# Altium PCB led_board.PcbDoc
Units mil, origin at the board's own origin, x right, y up, seen from the top; angles counter-clockwise.
Board outline 394 x 394 mil, 2 copper layers (Top Layer, Bottom Layer); 4 components, 4 nets, 12 pads, 4 vias.
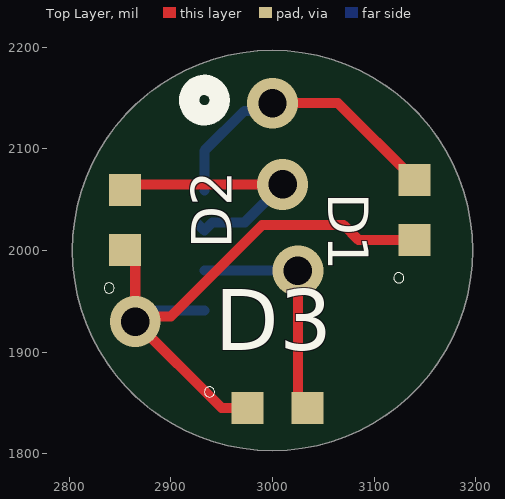
[diagram p0: Top Layer view]
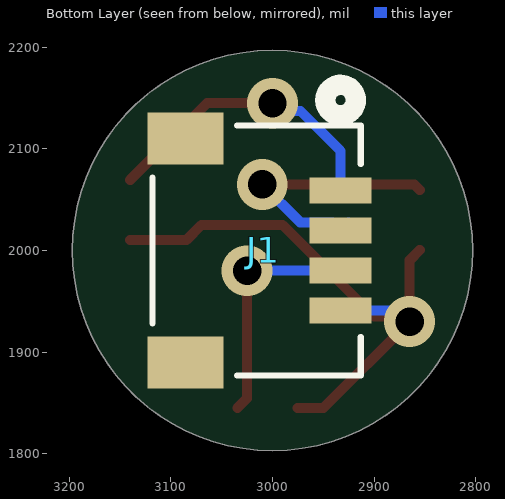
[diagram p1: Bottom Layer view, seen from below]
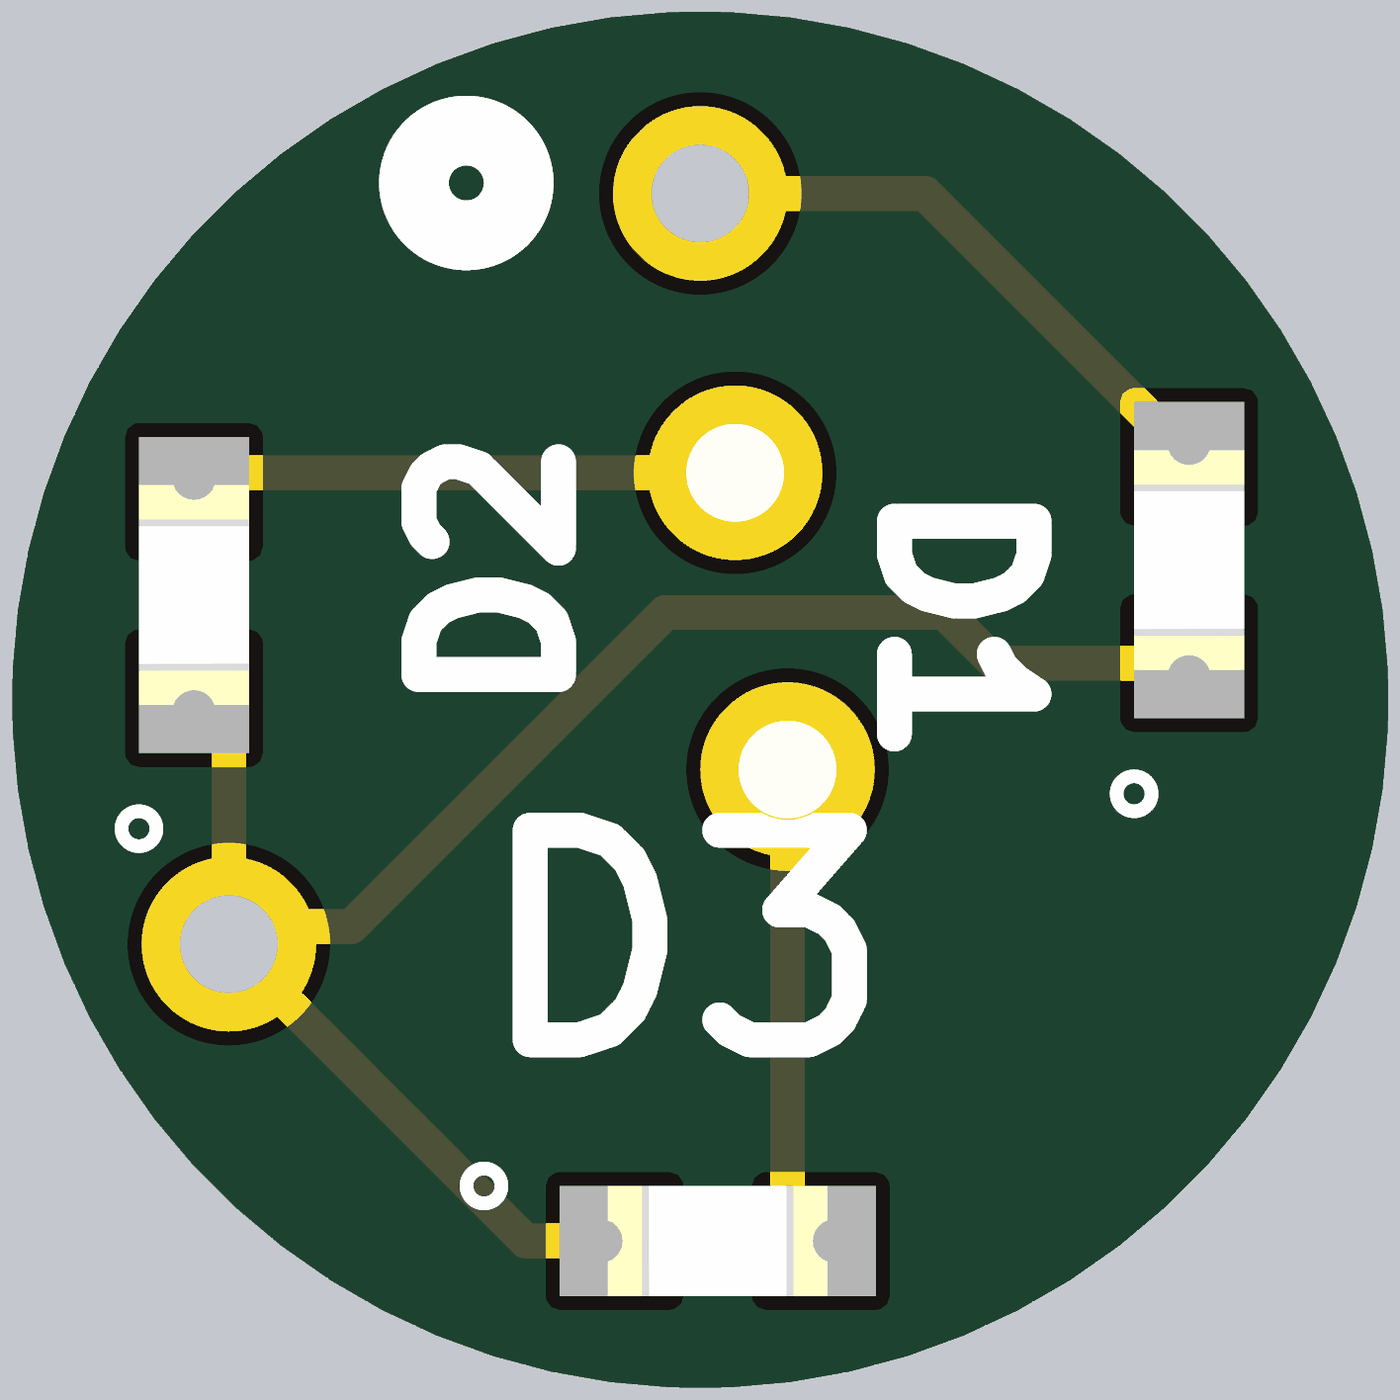
[diagram p2: 3D render of the assembled board from above, using the file's embedded part models]

## Layer stack, top to bottom
Top Solder: solder mask 0.4, Solder Resist, Dk 3.5
Top Layer: signal copper 1.4
Dielectric 1: dielectric 12.6, FR-4, Dk 4.8
Bottom Layer: signal copper 1.4
Bottom Solder: solder mask 0.4, Solder Resist, Dk 3.5

## Board outline
2803,2000 ccw(c3000,2000) 3000,1803 ccw(c3000,2000) 3197,2000 ccw(c3000,2000) 3000,2197 ccw(c3000,2000)

## Design rules (kind name [scope] priority, off if disabled: settings)
Clearance [All] p1: gap=10 ignorepadtopadclearanceinfootprint=FALSE except(0: Arc-Hole Track-Hole SMDPad-Hole THPad-Hole Via-Hole Fill-Hole Poly-Hole Region-Hole Text-Hole)
PolygonConnect [All] p1: connectstyle=Relief reliefconductorwidth=10 reliefentries=4 polygonreliefangle="90 Angle" airgapwidth=10
RoomDefinition led_board [InComponentClass('led_board')] p1: confinementstyle=ConfineIn formatcopy=TRUE lockcomponents=FALSE outline 2760,1740 3240,1740 3240,2240 2760,2240
RoutingVias [All] p1: holewidth=28 width=50 viastyle="Through Hole" minholewidth=28 minwidth=50 maxholewidth=28 maxwidth=50
SolderMaskExpansion [All] p1: expansion=4 istentingtop=FALSE
Width [All] p1: maxlimit=10 minlimit=10 preferedwidth=10
30 further rules are at their usual default settings.

## Components (designator, comment, footprint, x,y, rotation, side; value= is the part's Value field where it differs from the comment)
D1 "LED" LEDM1608X80 3140,2040 r90 top
D2 "LED" LEDM1608X80 2855,2030 r90 top
D3 "LED" LEDM1608X80 3005,1845 r0 top
J1 "SM04B-SRSS-TB" CONN_SM04B-SRSS-TB_JST 3015.62,2000 r90 bottom

## Footprints (in the part's own frame and the unit in brackets; to place one, negate y for a bottom-side part, rotate by r counter-clockwise, add the part's x,y. Pads: shape width x height; smd on the part's side, far side on the other; paste and mask are expansions set on the pad)
CONN_SM04B-SRSS-TB_JST [mil]
  rect 26x61 smd paste+0 mask+0: 1(59.06,-82.62) 2(19.68,-82.62) 3(-19.68,-82.62) 4(-59.06,-82.62)
  rect 51x75 smd paste-37.5 mask-37.5: 5(-110.24,69.94) 6(110.24,69.94)
  silkscreen extent -123,-103 163,103, body extent -118,-117 118,78, height 128
LEDM1608X80 [mm]
  rect 0.8x0.8 smd: A(0.75,0) C(-0.75,0)
  silkscreen extent -1.83,0.27 -1.57,0.53, body extent -0.8,-0.4 0.8,0.4, height 0.8

## Part data
D1 D2 D3: library part LTST-C190KFKT, "Single Color LED, Ultra Bright Orange, Water Clear, 1.1mm", Case Code (Imperial)=0603, Case Code (Metric)=1608, Color=Orange, Forward Current=30mA, Forward Voltage=2V, Lens Color=Colorless, Manufacturer="Vishay Lite-On", Max Operating Temperature=85°C, Min Operating Temperature=-55°C, Package Quantity=3000, Power Dissipation=75mW, Resistance=47kR, Reverse Voltage=5V, Supplier Part Number 1=160-1434-1-ND, Test Current=20mA, Tolerance=1%, Voltage Rating=50V, Case/Package=0603, Category=LEDs, ComponentLink1Description=https://datasheet.ciiva.com/11774/0900766b80dc02a7-11774744.pdf?src-supplier=Rs, ComponentLink1URL=https://datasheet.ciiva.com/11774/0900766b80dc02a7-11774744.pdf?src-supplier=Rs, ComponentLink2Description=https://datasheet.ciiva.com/15201/getdatasheetpartid-309341-15201388.pdf?src-supplier=Verical, ComponentLink2URL=https://datasheet.ciiva.com/15201/getdatasheetpartid-309341-15201388.pdf?src-supplier=Verical, ComponentLink3Description=https://datasheet.ciiva.com/16396/lite-on20ltst-c190kfkt-16396246.pdf?src-supplier=Future+Electronics, ComponentLink3URL=https://datasheet.ciiva.com/16396/lite-on20ltst-c190kfkt-16396246.pdf?src-supplier=Future+Electronics, ComponentLink4Description=https://datasheet.ciiva.com/12400/100-ltst-c190kfkt-53640-12400769.pdf?src-supplier=Mouser, ComponentLink4URL=https://datasheet.ciiva.com/12400/100-ltst-c190kfkt-53640-12400769.pdf?src-supplier=Mouser, ComponentLink5Description=https://datasheet.ciiva.com/2109/s-110-ltst-c190kfkt-2109976.pdf?src-supplier=Digikey, ComponentLink5URL=https://datasheet.ciiva.com/2109/s-110-ltst-c190kfkt-2109976.pdf?src-supplier=Digikey, ComponentLink6Description=https://datasheet.ciiva.com/2109/s-110-ltst-c190kfkt-2109977.pdf?src-supplier=Digikey, ComponentLink6URL=https://datasheet.ciiva.com/2109/s-110-ltst-c190kfkt-2109977.pdf?src-supplier=Digikey, ComponentLink7Description=https://datasheet.ciiva.com/2109/s-110-ltst-c190kfkt-2109978.pdf?src-supplier=Digikey, ComponentLink7URL=https://datasheet.ciiva.com/2109/s-110-ltst-c190kfkt-2109978.pdf?src-supplier=Digikey, Depth=1.6mm, Dominant Wavelength=605nm, Height=0.9mm, Illumination Color=Orange, Lead Free="Lead Free", Length=3.2mm, Lens Size=0.8mm, Lens Style=Flat,Diffused,Colorless,Rectangular,Clear, Lens Transparency=Clear, Luminous Intensity=90mcd, Manufacturer Part Number=LTST-C190KFKT, Mount="Surface Mount", Number of Elements=1, Number of LEDs=1, Number of Pins=2, Packaging="Tape and Reel", Power Rating=75mW, Pricing 1="1=0.13, 10=0.089, 100=0.0613, 500=0.0484, 1000=0.0441, 2000=0.04042 (USD)", Radiation Hardening=No, Reach SVHC Compliant=4186SVHC, RoHS=Yes, RoHS Compliant=Yes, Series=-, Stock 1=96032, Supplier 1=Digikey, Viewing Angle=130°, Voltage Rating (DC)=50V, Wavelength=605nm, Width=0.8mm
J1: "No Description Available", Manufacturer_Name=JST, Supplier Part Number 1=455-SM04B-SRSS-TBTR-ND, Copyright="Copyright (C) 2025 Ultra Librarian. All rights reserved.", Manufacturer_Part_Number=SM04B-SRSS-TB, RefDes=RefDes, Type=Type

## Via types
v1: diameter 50, hole 28, Top Layer to Bottom Layer, 4 vias

## Nets (pads, with @x,y where several pads share a name; then routed paths per layer and width w, separated by ;. In a path a pad name is that pad's centre, name@x,y a point inside that pad or via, vN(x,y) a via of type N, cw(c..) or ccw(c..) an arc to the next point about the centre after c; other vN are vias at no path point)
NetD1_A: D1.A J1.1 | length 296.7
  Top Layer w10: v1(3000,2145) 3064.53,2145 D1.A
  Bottom Layer w10: J1.1 2933,2098 2972.35,2137.35 2992.35,2137.35 v1(3000,2145)
NetD1_C: D1.C D2.C D3.C J1.4 | length 613.2
  Top Layer w10: D2.C 2865,1990.47 2865,1935 v1(2865,1930) ; D3.C 2950,1845 v1(2865,1930) ; D1.C 3084.53,2010.47 3070,2025 2990,2025 2900,1935 2870,1935 v1(2865,1930)
  Bottom Layer w10: v1(2865,1930) 2875.94,1940.94 J1.4
NetD2_A: D2.A J1.2 | length 264.1
  Top Layer w10: D2.A 2860.47,2065 v1(3010,2065)
  Bottom Layer w10: J1.2@2925.18,2027.5 J1.2 2941,2027.68 2972.68,2027.68 v1(3010,2065)
NetD3_A: D3.A J1.3 | length 231.1
  Top Layer w10: v1(3025,1980) 3025,1854.53 D3.A
  Bottom Layer w10: J1.3 3024.68,1980.32 v1(3025,1980)
pads on no net: J1.5 J1.6

## Silkscreen, mask and mechanical layers (free items; w line width, h text height)
Mechanical 1:
  circle w5: c3000,2000 r197